# Altium PCB Ada - Base Block - Baseblock_issue 4.0.PcbDoc (part 2 of 2)
Units mil, origin at the board's own origin, x right, y up, seen from the top; angles counter-clockwise.
Board outline 2389.8 x 4110.27 mil, 2 copper layers (Top Layer, Bottom Layer), stack 61.855 mil thick; 112 components, 93 nets, 358 pads, 233 vias.
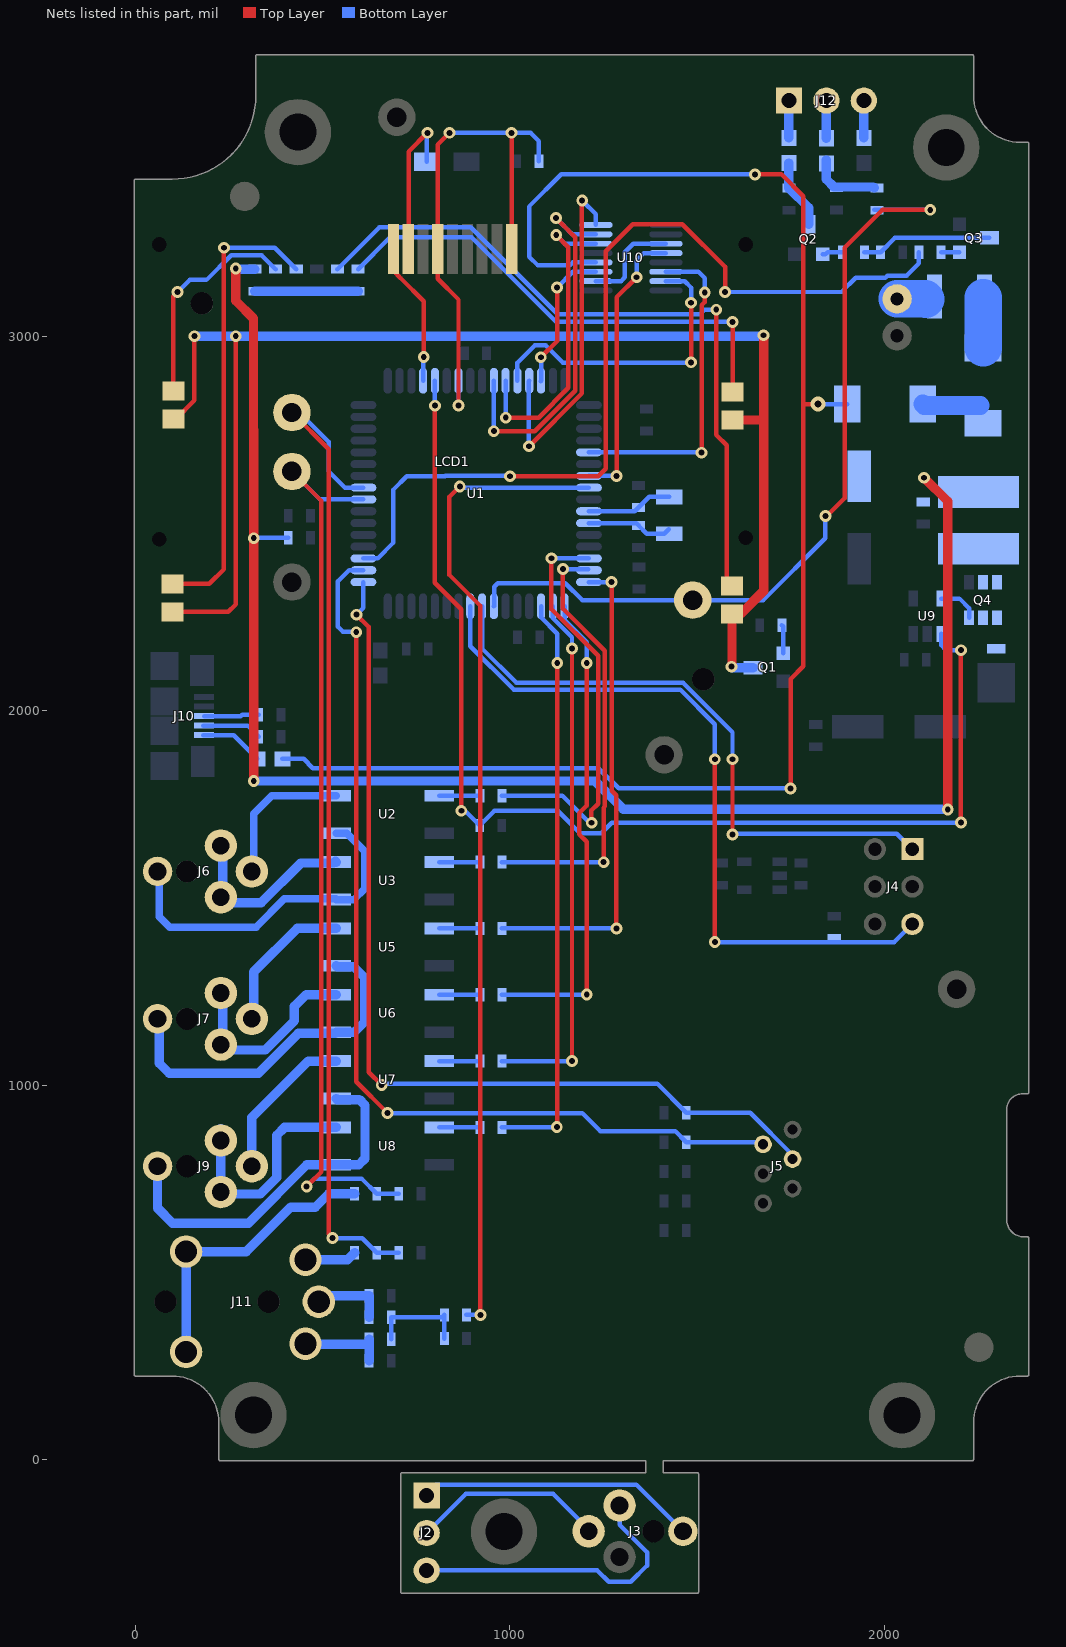
[diagram p2: the nets of this part, all layers, seen from the top]

## Via types
v1: diameter 31.5, hole 15.75, Top Layer to Bottom Layer, tented both sides, 231 vias
v2: diameter 39.37, hole 19.68, Top Layer to Bottom Layer, tented both sides, 2 vias

## Nets (pads, with @x,y where several pads share a name; then routed paths per layer and width w, separated by ;. In a path a pad name is that pad's centre, name@x,y a point inside that pad or via, vN(x,y) a via of type N, cw(c..) or ccw(c..) an arc to the next point about the centre after c; other vN are vias at no path point) (continued)
KEY4: J5.3 R4.1 U1.1 | length 2568.2
  Top Layer w12: v1(589.87,2256.22) 622.3,2223.8 622.3,1896.36 623.19,1895.47 623.19,1034.29 v1(657.48,1000)
  Bottom Layer w12: v1(589.87,2256.22) 608.71,2275.06 U1.1@608.71,2343.45 ; v1(657.48,1000) 661.42,1003.94 1393.12,1003.94 R4.1@1470.91,926.14 1641.9,926.14 1754.83,813.21 J5.3@1754.83,802.2
KEY5: J5.2 R5.1 U1.2 | length 2612.8
  Top Layer w12: v1(589.42,2209.49) 589.42,1009 v1(673.23,925.2)
  Bottom Layer w12: v1(589.42,2209.49) 587.81,2211.1 553.81,2211.1 540.71,2224.21 540.71,2345.45 570.21,2374.95 U1.2@608.71,2374.95 ; v1(673.23,925.2) 1192.91,925.2 1240.99,877.12 1441.2,877.12 R5.1@1470.91,847.4 1670.26,847.4 J5.2@1676.09,841.57
LCD_PWR: C8.2 LCD1.1 LCD1.6 U1.23 | length 1433.8
  Top Layer w12: v1(838.58,3543.31) 807.3,3512.03 807.3,3245.73 807.09,3245.51 807.09,3153.54 862.65,3097.98 v1(862.65,2814.96) ; v1(1003.94,3543.31) 1004.68,3542.57 LCD1.1@1004.68,3245.73
  Bottom Layer w12: v1(838.58,3543.31) v1(1003.94,3543.31) 1055.12,3543.31 1077.21,3521.21 C8.2@1077.21,3467.47 ; v1@862.2,2811.02 862.65,2811.47 v1(862.65,2814.96) U1.23@862.65,2880.85
LCD_RST: LCD1.9 U1.20 | length 319.6
  Top Layer w12: LCD1.9@695.53,3167.78 701.56,3161.74 701.56,3161.31 708.59,3154.28 709.03,3154.28 769.78,3093.52 v1(769.78,2944.6)
  Bottom Layer w12: U1.20@768.16,2880.85 768.16,2940.66 v1@772.1,2944.6
MIC: R25.1 U1.40 | length 2641.8
  Top Layer w12: v1(866.14,2598.43) 838.58,2570.87 838.58,2362.2 921.26,2279.53 v1(921.26,385.83)
  Bottom Layer w12: v1(866.14,2598.43) 869.15,2595.42 U1.40@1211.07,2595.42 ; R25.1@883.86,385.83 v1(921.26,385.83)
NetC9_1: C9.1 LCD1.8 | length 409.3
  Top Layer w12: LCD1.8@729.5,3233.21 729.5,3493.28 v1(779.53,3543.31)
  Bottom Layer w12: C9.1@778,3465.5 778,3541.78 v1(779.53,3543.31)
NetC14_1: C14.1 J11.1 R35.1 | length 198.3
  Bottom Layer w25: J11.1@489.42,421.12 505.31,437.01 R35.1@624.02,437.01 C14.1@624.02,379.92
NetC14_2: C14.2 C20.2 R25.2 R26.1 | length 266.2
  Bottom Layer w12: C20.2@683.07,320.87 C14.2@683.07,379.92 818.9,379.92 R25.2@824.8,385.83 R26.1@824.8,322.83
NetC18_2: C18.2 L5.2 R29.2 | length 188.7
  Bottom Layer w25: L5.2@1845.15,3470.79 1845.15,3419.15 1865.74,3398.57 1970.91,3398.57 R29.2@1972.88,3396.6
NetC19_2: C19.2 L4.2 Q2.3 | length 186
  Bottom Layer w25: L4.2@1745.15,3462.84 C19.2@1745.16,3395.54 1797.87,3342.84 Q2.3@1797.87,3298.67
NetC20_1: C20.1 J11.6 R34.1 | length 227.9
  Bottom Layer w25: J11.6@453.99,308.91 455.82,307.09 C20.1@624.02,307.09 ; R34.1@624.02,263.78 C20.1@624.02,307.09 ; C20.1@624.02,320.87 C20.1@624.02,307.09
NetD1_A: D1.A F1.2 | length 133.9
  Bottom Layer w100: D1.A@2263.78,2968.5 F1.2@2263.78,3102.36
NetD3_A: D3.A L2.2 Q4.1 Q4.2 Q4.5 Q4.6
NetF1_1: F1.1 J8.1 | length 76.7
  Bottom Layer w100: J8.1@2034.06,3099.67 2108.99,3099.67 2110.24,3098.43
NetJ2_1: J2.1 J3.1 | length 750.3
  Bottom Layer w12: J2.1@777.77,-96.57 777.77,-92.33 802.32,-67.78 1337.97,-67.78 J3.1@1462.18,-191.98
NetJ2_2: J2.2 J3.4 | length 521.7
  Bottom Layer w12: J2.2@777.77,-196.56 882,-92.33 1115.34,-92.33 1212.6,-189.59 J3.4@1210.21,-191.98
NetJ2_3: J2.3 J3.2 | length 809.6
  Bottom Layer w12: J2.3@777.77,-296.56 1233.57,-296.56 1263.78,-326.77 1322.83,-326.77 1366.14,-283.46 1366.14,-248.03 1292.89,-174.78 J3.2@1292.89,-123.08
NetJ6_1: J6.1 U2.3 U3.3 | length 907
  Bottom Layer w20: J6.1@63.43,1556.05 63.56,1555.92 63.56,1449.22 91.33,1421.45 321.84,1421.45 397.34,1496.95 534.35,1496.95 U3.3@535.88,1495.42 583.51,1495.42 612,1523.91 612,1624.19 563.61,1672.58 U2.3@535.88,1672.58
NetJ6_2: J6.2 J6.3 U3.4 | length 487.3
  Bottom Layer w25: J6.3@232.73,1624.95 232.73,1487.15 335.85,1487.15 441.62,1592.92 529.75,1592.92 534.06,1597.23 U3.4@535.88,1595.42
NetJ6_4: J6.4 U2.4 | length 409.1
  Bottom Layer w20: J6.4@315.4,1556.05 315.4,1724.43 363.98,1773 535.46,1773 U2.4@535.88,1772.58
NetJ7_1: J7.1 U5.3 U6.3 | length 927.5
  Bottom Layer w25: J7.1@63.43,1162.35 63.43,1058.1 89.89,1031.64 328.41,1031.64 434.63,1137.86 532.65,1137.86 U6.3@535.88,1141.09 583.96,1141.09 612,1169.13 612,1286.67 582.88,1315.78 538.34,1315.78 U5.3@535.88,1318.25
NetJ7_2: J7.2 J7.3 U6.4 | length 525
  Bottom Layer w25: J7.3@232.73,1231.24 232.73,1093.45 346.38,1093.45 424.37,1171.44 424.37,1210.11 455.64,1241.38 535.58,1241.38 U6.4@535.88,1241.09
NetJ7_4: J7.4 U5.4 | length 408.1
  Bottom Layer w25: J7.4@315.4,1162.35 315.4,1301.72 431.94,1418.25 U5.4@535.88,1418.25
NetJ9_1: J9.1 U7.3 U8.3 | length 981.4
  Bottom Layer w25: J9.1@58.71,783.01 58.71,671.18 98.86,631.04 301.82,631.04 457.54,786.76 U8.3@535.88,786.76 596.42,786.76 613.08,803.41 613.08,945.91 597.97,961.02 538.78,961.02 U7.3@535.88,963.92
NetJ9_2: J9.2 J9.3 U8.4 | length 622.6
  Bottom Layer w25: J9.3@228,883.73 J9.3@228,851.91 J9.2@228,714.11 228,708.88 333.2,708.88 377.21,752.89 377.21,865.89 398.08,886.76 U8.4@535.88,886.76
NetJ9_4: J9.4 U7.4 | length 385.9
  Bottom Layer w25: J9.4@310.68,814.83 310.68,913.1 461.5,1063.92 U7.4@535.88,1063.92
NetJ10_1: J10.1 L3.1 | length 170.7
  Bottom Layer w12: J10.1@180.67,1934.03 262.22,1934.03 L3.1@325.25,1871.01
NetJ10_2: J10.2 R21.2 | length 160.5
  Bottom Layer w12: J10.2@181.16,1960.11 299.14,1960.11 R21.2@329.18,1930.06
NetJ10_3: J10.3 R23.2 | length 147.3
  Bottom Layer w12: J10.3@183.39,1985.58 281.22,1985.58 284.76,1989.12 R23.2@329.18,1989.12
NetJ11_2: J11.2 R24.1 | length 138.9
  Bottom Layer w25: J11.2@453.99,533.32 566.31,533.34 R24.1@585.09,552.11
NetJ11_3: J11.3 R22.1 | length 781.8
  Bottom Layer w25: J11.3@135.09,287.26 J11.3@135.09,554.98 295.54,554.99 414.21,673.66 480.26,673.66 516.19,709.59 R22.1@585.09,709.59
NetJ12_1: J12.1 L4.1 | length 99.6
  Bottom Layer w25: L4.1@1745.15,3529.77 1745.15,3629.1 J12.1@1745.32,3629.28
NetJ12_2: J12.2 L5.1 | length 100.7
  Bottom Layer w25: L5.1@1845.33,3528.59 J12.2@1845.32,3629.28
NetJ12_3: J12.3 L6.1 | length 99.3
  Bottom Layer w25: L6.1@1945.53,3529.77 J12.3@1945.53,3629.07
NetLED1_A: LED1.A R9.1 | length 587.1
  Top Layer w12: LED1.A@101.07,2853.41 101.07,3106.53 v1(112.26,3117.73)
  Bottom Layer w12: v1(112.26,3117.73) 144.72,3150.18 189.42,3150.18 255.78,3216.54 336.61,3216.54 R9.1@374.02,3179.13
NetLED1_K: LED1.K LED2.K LED3.K LED4.K Q1.D | length 3735.3
  Top Layer w12: LED2.K@98.79,2263.66 247.91,2263.66 267.72,2283.46 v1(267.72,3000.1) ; LED1.K@107.54,2778.61 157.48,2828.54 v1(157.48,3000.1)
  Top Layer w25: LED1.K@101.07,2778.61 LED1.K@107.54,2778.61 ; v1@1593.27,2117.3 LED4.K@1593.27,2258.33 1616.6,2258.33 1677.61,2319.34 1677.61,2775.59 ; LED3.K@1594.6,2776.1 1677.1,2776.1 1677.61,2775.59 ; v1(1677.3,3002.52) 1677.61,3002.21 1677.61,2775.59
  Bottom Layer w25: v1(157.48,3000.1) v1(267.72,3000.1) v1@1677.61,3000.1 ; v1@1594.11,2115.15 1594.58,2114.68 Q1.D@1649.47,2114.68
  other v1: 1591.96,2117.3
NetLED2_A: LED2.A R11.1 | length 1228.6
  Top Layer w12: LED2.A@98.79,2338.46 196.73,2338.46 236.22,2377.95 v1(236.22,3236.22)
  Bottom Layer w12: v1(236.22,3236.22) 372.05,3236.22 R11.1@429.13,3179.13
NetLED3_A: LED3.A R30.1 | length 1316.1
  Top Layer w12: LED3.A@1594.6,2850.91 v1(1594.6,3038.29) v1@1594.69,3038.38
  Bottom Layer w12: R30.1@594.49,3179.13 679.13,3263.78 897.64,3263.78 1123.13,3038.29 v1(1594.6,3038.29)
NetLED4_A: LED4.A R31.1 | length 1910.6
  Top Layer w12: v1@1551.18,3066.93 1551.18,2736.22 1578.74,2708.66 1578.74,2347.66 LED4.A@1593.27,2333.14
  Bottom Layer w12: R31.1@539.37,3179.13 651.57,3291.34 895.53,3291.34 1127.82,3059.06 1507.87,3059.06 1519.68,3070.87 v1(1551.18,3070.87)
NetQ1_G: Q1.G R13.2 | length 76.6
  Bottom Layer w12: R13.2@1726.38,2228.35 1729.47,2225.26 Q1.G@1729.47,2153.06
NetQ2_1: Q2.1 R14.2 | length 54.3
  Bottom Layer w12: Q2.1@1835.87,3218.67 1842.88,3218.67 1848.62,3224.41 R14.2@1887.8,3224.41
NetQ3_B: Q3.B R10.2 | length 49.2
  Bottom Layer w12: R10.2@2151.57,3224.41 Q3.B@2200.79,3224.41
NetQ3_C: Q3.C R8.2 R14.1 | length 349.7
  Bottom Layer w12: R14.1@1946.85,3224.41 R8.2@1990.16,3224.41 2028.16,3262.41 Q3.C@2280.79,3262.41
NetQ4_3: Q4.3 U9.5 | length 111
  Bottom Layer w12: U9.5@2151.57,2299.21 2200.79,2299.21 2226.38,2273.62 Q4.3@2226.38,2248.03
NetR9_2: R9.2 R11.2 R30.2 R31.2 R32.1 R33.1 | length 275.6
  Bottom Layer w25: R32.1@318.9,3120.08 R9.2@374.02,3120.08 R11.2@429.13,3120.08 R33.1@484.25,3120.08 R31.2@539.37,3120.08 R30.2@594.49,3120.08
NetR15_1: R15.1 U2.1 | length 108.3
  Bottom Layer w12: U2.1@811.47,1772.58 R15.1@919.73,1772.58
NetR15_2: R15.2 U1.46 | length 1135.8
  Top Layer w12: v1(1110.88,2406.95) 1110.88,2271.01 1235.65,2146.24 1235.65,1751.35 1217.55,1733.25 1217.55,1701.17 v1(1218.3,1700.42)
  Bottom Layer w12: R15.2@978.79,1772.58 1140.34,1772.58 1212.5,1700.42 v1(1218.3,1700.42) ; v1(1110.88,2406.95) 1111.39,2406.44 U1.46@1211.07,2406.44
NetR16_1: R16.1 U3.1 | length 108.3
  Bottom Layer w12: U3.1@811.47,1595.42 R16.1@919.73,1595.42
NetR16_2: R16.2 U1.47 | length 1169.4
  Top Layer w12: v1(1141.73,2377.95) 1141.73,2271.65 1253.65,2159.73 1253.65,1743.89 1250.57,1740.81 v1@1250.57,1594.82
  Bottom Layer w12: R16.2@978.79,1595.42 1250.1,1595.42 v1(1250.38,1595.14) ; v1(1141.73,2377.95) U1.47@1208.66,2377.95
NetR17_1: R17.1 U5.1 | length 108.3
  Bottom Layer w12: U5.1@811.47,1418.25 R17.1@919.73,1418.25
NetR17_2: R17.2 U1.48 | length 1297.8
  Top Layer w12: v1(1271.65,2343.45) 1271.65,1785.86 1283.62,1773.89 v1@1283.62,1416.99
  Bottom Layer w12: R17.2@978.79,1418.25 1284.02,1418.25 v1(1284.41,1417.86) ; U1.48@1211.07,2343.45 v1(1271.65,2343.45)
NetR18_1: R18.1 U6.1 | length 108.3
  Bottom Layer w12: U6.1@811.47,1241.09 R18.1@919.73,1241.09
NetR18_2: R18.2 U1.49 | length 1305.6
  Top Layer w12: v1@1205.17,1241.09 1205.17,1649.53 1184.52,1670.18 1184.52,1725.67 1205.17,1746.32 v1(1205.17,2126.91)
  Bottom Layer w12: R18.2@978.79,1241.09 1204.98,1241.09 v1(1205.27,1241.37) ; U1.49@1146.11,2278.49 1146.11,2241.46 1205.17,2182.41 v1(1205.17,2126.91)
NetR19_1: R19.1 U7.1 | length 108.3
  Bottom Layer w12: U7.1@811.47,1063.92 R19.1@919.73,1063.92
NetR19_2: R19.2 U1.50 | length 1423.6
  Top Layer w12: v1(1165.8,1063.92) v1(1165.8,2166.28)
  Bottom Layer w12: R19.2@978.79,1063.92 1163.49,1063.92 v1@1165.69,1061.71 ; U1.50@1114.62,2278.49 1114.62,2247.5 1165.8,2196.32 v1(1165.8,2166.28)
NetR20_1: R20.1 U8.1 | length 108.3
  Bottom Layer w12: U8.1@811.47,886.76 R20.1@919.73,886.76
NetR20_2: R20.2 U1.51 | length 1556.6
  Top Layer w12: v1@1126.43,886.76 v1(1126.43,2126.91)
  Bottom Layer w12: R20.2@978.79,886.76 1124.49,886.76 v1(1125.33,887.6) ; U1.51@1083.12,2278.49 1083.12,2248.96 1126.43,2205.65 v1(1126.43,2126.91)
NetR22_2: R22.2 R28.1 TP2.1 U1.8 | length 2450.8
  Top Layer w12: TP2.1@417.76,2638.73 496.51,2559.98 496.51,768.65 v1(457.14,729.28)
  Bottom Layer w12: TP2.1@417.76,2638.73 492.57,2563.92 U1.8@608.71,2563.92 ; v1(457.14,729.28) 476.82,748.96 604.77,748.96 R22.2@644.14,709.59 R28.1@703.2,709.59
NetR24_2: R24.2 R27.1 TP1.1 U1.9 | length 2763.8
  Top Layer w12: TP1.1@417.76,2796.21 515.75,2698.22 515.75,600.96 v1(525.71,590.99)
  Bottom Layer w12: TP1.1@417.76,2796.21 437.45,2796.21 516.19,2717.47 516.19,2638.73 559.5,2595.42 U1.9@608.71,2595.42 ; v1(525.71,590.99) 605.26,590.99 R24.2@644.14,552.11 R27.1@703.2,552.11
NetR29_1: R29.1 TP4.1 U1.55 | length 2240.7
  Top Layer w12: v1@1846.46,2519.69 1893.7,2566.93 1893.7,3236.22 1995.02,3337.54 v1(2122.66,3337.54)
  Bottom Layer w12: U1.55@957.14,2278.49 958.05,2279.41 958.05,2330.93 967.47,2340.35 1147.9,2340.35 1192.97,2295.28 1677.17,2295.28 1842.52,2460.63 v1(1842.52,2519.69) ; R29.1@1972.88,3337.54 v1@2119.15,3337.54
NetR36_1: R36.1 U1.21 U9.1 | length 3130.3
  Top Layer w12: v1(799.57,2814.42) 799.57,2341.37 870.19,2270.74 v1(870.19,1732.4) ; v1(2204.72,1700.79) v1(2204.72,2161.42)
  Bottom Layer w12: v1(799.57,2814.42) 799.65,2814.51 U1.21@799.65,2880.85 ; v1(870.19,1732.4) 879.8,1732.4 R36.1@919.29,1692.91 958.66,1732.28 1127.36,1732.28 1186.96,1672.68 1243.54,1672.68 1271.65,1700.79 v1(2204.72,1700.79) ; U9.1@2151.57,2204.72 2151.57,2175.2 2165.35,2161.42 v1(2204.72,2161.42)
NetU1_26: U1.26 U10.15 | length 1005
  Top Layer w12: v1(957.03,2746.32) 1065.99,2746.32 1174.17,2854.5 1174.17,3264.46 1155.32,3283.31 1155.32,3283.59 1136.75,3302.15 1136.48,3302.15 v1(1122.76,3315.87)
  Bottom Layer w12: v1(957.03,2746.32) 957.04,2880.75 U1.26@957.14,2880.85 U1.26@957.42,2881.13 ; v1(1122.76,3315.87) 1136.48,3302.15 1136.75,3302.15 1155.32,3283.59 1155.32,3283.31 1166.54,3272.09 U10.15@1229.77,3272.09
NetU1_27: U1.27 U10.14 | length 836.7
  Top Layer w12: v1(988.72,2782.4) 1076.62,2782.4 1156.17,2861.95 1156.17,3237.92 v1(1123.63,3270.46)
  Bottom Layer w12: U1.27@988.63,2880.85 988.63,2782.49 v1(988.72,2782.4) ; v1(1123.63,3270.46) 1147,3247.09 U10.14@1229.77,3247.09
NetU1_28: U1.28 U10.7 | length 824.2
  Top Layer w12: v1(1483.77,2930.19) v1(1483.77,3089.36)
  Bottom Layer w12: U1.28@1020.13,2880.85 1020.13,2929.53 1066.03,2975.44 1095.65,2975.44 1141.69,2929.4 v1@1483.77,2929.4 ; U10.7@1416.78,3147.09 1466.61,3147.09 1483.77,3129.93 v1(1483.77,3089.36)
NetU1_29: U1.29 U10.16 | length 970.4
  Top Layer w12: v1(1051.29,2706.16) 1192.17,2847.04 1192.17,3361.72 1192.66,3362.2 v1(1192.91,3362.2)
  Bottom Layer w12: v1(1051.29,2706.16) 1050.84,2706.61 1050.84,2880.06 U1.29@1051.62,2880.85 ; v1(1192.91,3362.2) 1229.77,3325.35 U10.16@1229.77,3297.09
NetU1_30: U1.30 U10.11 | length 389.4
  Top Layer w12: v1(1082.52,2943.75) 1125.98,2987.22 v1(1125.98,3129.92)
  Bottom Layer w12: U1.30@1082.52,2880.25 U1.30@1083.12,2880.85 1083.12,2943.16 v1(1082.52,2943.75) ; v1(1125.98,3129.92) 1168.15,3172.09 U10.11@1229.77,3172.09
NetU1_37: U1.37 U10.6 | length 889.7
  Top Layer w12: v1@1518.93,2690.41 1511.81,2697.53 1511.81,3082.68 1520.34,3091.2 v1(1520.34,3116.95)
  Bottom Layer w12: U1.37@1211.07,2689.91 v1@1518.93,2689.91 ; U10.6@1416.78,3172.09 1503.56,3172.09 1520.34,3155.31 v1(1520.34,3116.95)
  other v1: 1511.81,2688.98
NetU1_39: U1.39 U10.4 | length 758.2
  Top Layer w12: v1@1285.63,2626.8 1285.63,2965.9 1285.63,3104.53 v1(1338.58,3157.48)
  Bottom Layer w12: U1.39@1211.07,2626.91 1284.83,2626.91 v1(1284.95,2626.8) ; v1(1338.58,3157.48) 1338.58,3203.13 1357.54,3222.09 U10.4@1416.78,3222.09
NetU10_3: U10.3 U10.10 | length 267.6
  Bottom Layer w12: U10.10@1229.77,3147.09 1296.7,3147.09 1307.09,3157.48 1307.09,3224.41 1329.77,3247.09 U10.3@1416.78,3247.09
PDI: J4.1 U1.56 | length 1645.3
  Top Layer w12: v1(1594.49,1669.29) v1(1594.49,1870.08)
  Bottom Layer w12: U1.56@925.64,2278.49 925.64,2165.94 1017.37,2074.21 1462.36,2074.21 1594.49,1942.09 v1(1594.49,1870.08) ; v1(1594.49,1669.29) 1596.65,1671.45 2033.28,1671.45 J4.1@2074.8,1629.92
RST: J4.5 R6.1 U1.57 | length 1975.3
  Top Layer w12: v1(1547.24,1381.89) v1(1547.24,1870.08)
  Bottom Layer w12: U1.57@894.14,2278.49 894.14,2171.98 1009.91,2056.21 1454.91,2056.21 1547.24,1963.88 v1(1547.24,1870.08) ; v1(1547.24,1381.89) 2026.77,1381.89 J4.5@2074.8,1429.92
STACK_SW: R10.1 U1.3 | length 2453.4
  Top Layer w12: v1(1000,2625.98) 1236.22,2625.98 1255.91,2645.67 1255.91,3226.87 1328.25,3299.21 1460.63,3299.21 1574.8,3185.04 v1(1574.8,3118.11)
  Bottom Layer w12: U1.3@608.71,2406.44 646.6,2406.44 688.98,2448.82 688.98,2590.55 724.41,2625.98 826.77,2625.98 827.7,2626.91 999.07,2626.91 v1(1000,2625.98) ; v1(1574.8,3118.11) 1885.83,3118.11 1923.76,3156.04 2002.75,3156.04 2008.38,3161.67 2059.31,3161.67 2092.52,3194.88 R10.1@2092.52,3224.41
VBAT: C12.1 C13.2 D1.K D2.K L2.1 R7.2 R32.2 | length 4485.9
  Top Layer w25: v1(267.72,3181.1) 267.72,3094.49 314.96,3047.24 v1(315.65,2460.6) v1(315.65,1811.95) ; v1(2106.3,2622.05) 2169.29,2559.06 v1(2169.29,1736.22)
  Bottom Layer w12: v1(315.65,2460.6) 316.61,2461.56 R7.2@407.92,2461.56
  Bottom Layer w25: v1(267.72,3181.1) 269.68,3179.13 R32.2@318.9,3179.13 ; v1(315.65,1811.95) 1227.42,1811.95 1303.15,1736.22 v1(2169.29,1736.22)
  Bottom Layer w50: D2.K@2102.36,2818.9 2106.3,2814.96 2256.35,2814.96
VBUS: D2.A L3.2 U10.12 | length 4228.3
  Top Layer w12: v1(1654.73,3432.3) 1725.18,3432.3 1783.65,3373.83 1783.65,2818.9 ; v1(1749.45,1792.27) 1749.45,2084.09 1783.65,2118.3 1783.65,2818.9 ; v2(1822.83,2818.9) 1783.65,2818.9
  Bottom Layer w12: L3.2@392.17,1871.01 449.1,1871.01 473.66,1846.46 1236.22,1846.46 1290.41,1792.27 v1(1749.45,1792.27) v1@1756.35,1792.27 ; U10.12@1229.77,3197.09 1167.7,3197.09 1159.58,3188.98 1074.8,3188.98 1051.18,3212.6 1051.18,3346.46 1137.02,3432.3 v1(1654.73,3432.3) ; v2(1822.83,2818.9) D2.A@1901.58,2818.9
X1: C1.2 U1.43 X1.1 | length 230.1
  Bottom Layer w12: U1.43@1211.07,2500.93 1337.17,2500.93 C1.2@1343.56,2494.54 1365.65,2472.44 1412.01,2472.44 X1.1@1424.27,2484.69
X2: C2.2 U1.42 X1.2 | length 230
  Bottom Layer w12: U1.42@1211.07,2532.43 1333.39,2532.43 C2.2@1343.12,2542.16 1371.83,2570.87 X1.2@1425.2,2570.87
pads on no net: "Fiducial 1.0" "Fiducial 2.0" Hole1.1 Hole2.1 Hole3.1 Hole4.1 Hole5.1 J3.0 J3.3 J4.3 J4.4 J6.0 J7.0 J9.0 J10.0 J10.4 J11.0 LCD1.0 U1.4 U1.5 U1.6 U1.10 U1.11 U1.12 U1.13 U1.22 U1.31 U1.41 U1.58 U1.59 U4.4 U9.3

## Polygon pours and split planes (outlines as drawn)
GND on Top Layer "Top Layer-No Net2" (solid, remove dead copper, pour order 5): 222.63,0.29 cw(c226.59,0.29) 222.63,0.35 222.63,98.71 ccw(c98.63,98.71) 98.63,222.71 cw(c98.63,226.66) 98.6,222.71 0.21,222.71 cw(c0.21,226.66) -3.74,226.66 -3.74,3415.64 cw(c0.21,3415.64) 0.21,3419.59 98.63,3419.59 cw(c98.63,3415.64) 98.66,3419.59 ccw(c98.63,3642.02) 321.06,3641.99 cw(c325.01,3642.02) 321.06,3642.02 321.06,3748.32 cw(c325.01,3748.32) 325.01,3752.27 2234.46,3752.27 cw(c2234.46,3748.32) 2238.41,3748.32 2238.41,3642.02 ccw(c2362.41,3642.02) 2362.41,3518.02 cw(c2362.41,3514.07) 2362.44,3518.02 2382.1,3518.02 cw(c2382.1,3514.07) 2386.05,3514.07 2386.05,980.31 cw(c2382.1,980.31) 2382.1,976.36 2368.9,976.36 ccw(c2368.9,980.31) 2368.93,976.36 2368.9,976.36 ccw(c2368.9,934.25) 2326.79,934.25 2326.79,640.55 ccw(c2372.83,640.55) 2372.83,594.5 2382.1,594.5 cw(c2382.1,590.55) 2386.05,590.55 2386.05,226.66 cw(c2382.1,226.66) 2382.1,222.71 2362.41,222.71 ccw(c2362.41,226.66) 2362.44,222.71 2362.41,222.71 ccw(c2362.41,98.71) 2238.41,98.71 2238.41,0.29 cw(c2234.46,0.29) 2234.46,-3.67 1409.46,-3.67 1409.46,-35.13 1525.8,-35.13 cw(c1525.8,-39.08) 1529.75,-39.08 1529.75,-354.05 cw(c1525.8,-354.05) 1525.8,-358 699.03,-358 cw(c699.03,-354.05) 695.08,-354.05 695.08,-39.08 cw(c699.03,-39.08) 699.03,-35.13 1362.19,-35.13 1362.19,-3.67 226.65,-3.67 cw(c226.59,0.29)
GND on Bottom Layer "Top Layer-No Net" (solid, remove dead copper, pour order 8): 222.63,0.29 cw(c226.59,0.29) 222.63,0.35 222.63,98.71 ccw(c98.63,98.71) 98.63,222.71 cw(c98.63,226.66) 98.6,222.71 0.21,222.71 cw(c0.21,226.66) -3.74,226.66 -3.74,3415.64 cw(c0.21,3415.64) 0.21,3419.59 98.63,3419.59 cw(c98.63,3415.64) 98.66,3419.59 ccw(c98.63,3642.02) 321.06,3641.99 cw(c325.01,3642.02) 321.06,3642.02 321.06,3748.32 cw(c325.01,3748.32) 325.01,3752.27 2234.46,3752.27 cw(c2234.46,3748.32) 2238.41,3748.32 2238.41,3642.02 ccw(c2362.41,3642.02) 2362.41,3518.02 cw(c2362.41,3514.07) 2362.44,3518.02 2382.1,3518.02 cw(c2382.1,3514.07) 2386.05,3514.07 2386.05,980.31 cw(c2382.1,980.31) 2382.1,976.36 2368.9,976.36 ccw(c2368.9,980.31) 2368.93,976.36 2368.9,976.36 ccw(c2368.9,934.25) 2326.79,934.25 2326.79,640.55 ccw(c2372.83,640.55) 2372.83,594.5 2382.1,594.5 cw(c2382.1,590.55) 2386.05,590.55 2386.05,226.66 cw(c2382.1,226.66) 2382.1,222.71 2362.41,222.71 ccw(c2362.41,226.66) 2362.44,222.71 2362.41,222.71 ccw(c2362.41,98.71) 2238.41,98.71 2238.41,0.29 cw(c2234.46,0.29) 2234.46,-3.67 1409.46,-3.67 1409.46,-35.13 1525.8,-35.13 cw(c1525.8,-39.08) 1529.75,-39.08 1529.75,-354.05 cw(c1525.8,-354.05) 1525.8,-358 699.03,-358 cw(c699.03,-354.05) 695.08,-354.05 695.08,-39.08 cw(c699.03,-39.08) 699.03,-35.13 1362.19,-35.13 1362.19,-3.67 226.65,-3.67 cw(c226.59,0.29)

## Keep-outs
Keep-Out Layer:
  lines w7.87: 226.59,0.29 226.59,98.71 ccw(c98.63,98.71) 98.63,226.66 ; 2234.46,0.29 2234.46,98.71 cw(c2362.41,98.71) 2362.41,226.66 ; 98.63,226.66 0.21,226.66 0.21,3415.64 98.63,3415.64 ; 98.63,226.66 98.63,226.66 ; 98.63,3415.64 ccw(c98.63,3642.02) 325.01,3642.02 ; 98.63,3415.64 98.63,3415.64 ; 325.01,3642.02 325.01,3748.32 2234.46,3748.32 2234.46,3642.02 ccw(c2362.41,3642.02) 2362.41,3514.07 ; 325.01,3642.02 325.01,3642.02 ; 2362.41,226.66 2382.1,226.66 2382.1,590.55 2372.83,590.55 cw(c2372.83,640.55) 2322.83,640.55 2322.83,669.29 2322.83,934.25 cw(c2368.9,934.25) 2368.9,980.31 2382.1,980.31 2382.1,3514.07 2362.41,3514.07 ; 2362.41,226.66 2362.41,226.66 ; 2362.41,3514.07 2362.41,3514.07 ; 702.98,-350.09 702.98,-43.04 1521.85,-43.04 1521.85,-350.09 702.98,-350.09
  text ".Layer_Name" at 5967.75,656.68 h120

## Other copper
Top Layer:
  pour cut-out: -146.29,1712.6 393.7,1712.6 393.7,633.86 -153.54,633.86 -153.54,614.17
  text ".Layer_Name" at 4077.99,302.35 h120
Bottom Layer:
  rectangle net GND: 1866.14,2314.96 1905.51,2346.46
  rectangle net GND: 1783.46,1503.94 1822.83,1555.12
  rectangle net GND: 1748.03,1476.38 1799.21,1547.24
  rectangle net GND: 1704.72,1547.24 1799.21,1570.87
  rectangle net 3V3: 1555.12,1586.61 1641.73,1629.92
  rectangle net GND: 1779.53,1925.2 2051.18,2279.53
  rectangle net 5V: 2082.68,1925.2 2358.27,2129.92
  rectangle net NetD3_A: 2255.91,2153.54 2358.27,2417.32
  rectangle net GND: 1893.7,2275.59 2094.49,2330.71
  rectangle net GND: 1874.02,2330.71 2129.92,2511.81
  rectangle net GND: 1893.7,2330.71 2240.16,2377.95
  rectangle net VBAT: 2110.24,2685.04 2354.33,2870.08
  rectangle net VBAT: 1885.83,2555.12 2354.33,2688.98
  pour cut-out: 2366.14,2535.43 2051.18,2535.43 2051.18,2173.23 2366.14,2173.23
  pour cut-out: -149.61,1807.09 732.28,1807.09 732.28,633.86 -157.48,633.86 -157.48,614.17
  text ".Layer_Name" at 4727.59,184.24 h120
Multi-Layer:
  text ".Layer_Name" at 5022.87,656.68 h120

## Silkscreen, mask and mechanical layers (free items; w line width, h text height)
Top Overlay:
  text ".Layer_Name" at 4077.99,420.46 h120
Bottom Overlay:
  drawing of 984 lines, arcs and shapes, not listed
  text "c Triggertrap Ltd" at 1953.12,1216.45 h39.37
  text ".PCBVersionNumber" at 1291.34,1129.92 h39.37
  text ".PCBName" at 1929.13,1129.92 h39.37
  text ".PCBIssueDate" at 1921.26,1066.93 h39.37
  text "Copyright 2014" at 1669.29,227.53 h39.37
  text ".Layer_Name" at 4727.59,66.13 h120
Top Paste:
  text ".Layer_Name" at 5022.87,420.46 h120
Bottom Paste:
  text ".Layer_Name" at 5022.87,302.35 h120
Top Solder:
  text ".Layer_Name" at 5022.87,184.24 h120
Bottom Solder:
  text ".Layer_Name" at 5022.87,66.13 h120
Drill Guide:
  text ".Layer_Name" at 5967.75,538.57 h120
Mechanical 1:
  lines w7.87: 226.59,0.29 226.59,98.71 ccw(c98.63,98.71) 98.63,226.66 0.21,226.66 0.21,3415.64 98.63,3415.64 ccw(c98.63,3642.02) 325.01,3642.02 325.01,3748.32 2234.46,3748.32 2234.46,3642.02 ccw(c2362.41,3642.02) 2362.41,3514.07 2382.1,3514.07 2382.1,980.31 2368.9,980.31 ccw(c2368.9,934.25) 2322.83,934.25 2322.83,669.29 2322.83,640.55 ccw(c2372.83,640.55) 2372.83,590.55 2382.1,590.55 2382.1,226.66 2362.41,226.66 ccw(c2362.41,98.71) 2234.46,98.71 2234.46,0.29 1405.51,0.29 1405.51,-39.08 1500,-39.08 1500,-354.05 712.6,-354.05 712.6,-39.08 738.4,-39.08 1366.14,-39.08 1366.14,0.29 226.58,0.29 ; 226.58,0.28 226.58,0.29
  text ".Layer_Name" at 4077.99,656.68 h120
Mechanical 2:
  lines w7.87: -181.1,1622.05 -62.99,1622.05 ; -181.1,1740.16 -62.99,1740.16 ; -181.1,1858.27 -62.99,1858.27 ; -181.1,1968.5 -62.99,1968.5 ; -181.1,2086.61 -62.99,2086.61 ; -181.1,2204.72 -62.99,2204.72 ; -173.23,90.55 -55.12,90.55 ; -173.23,208.66 -55.12,208.66 ; -173.23,326.77 -55.12,326.77 ; -173.23,480.31 -55.12,480.31 ; -173.23,598.43 -55.12,598.43 ; -173.23,716.54 -55.12,716.54 ; -173.23,862.2 -55.12,862.2 ; -173.23,980.31 -55.12,980.31 ; -173.23,1098.43 -55.12,1098.43 ; -173.23,1244.09 -55.12,1244.09 ; -173.23,1362.2 -55.12,1362.2 ; -173.23,1480.31 -55.12,1480.31 ; -102.36,1582.68 -62.99,1622.05 ; -102.36,1661.42 -62.99,1622.05 ; -102.36,1700.79 -62.99,1740.16 ; -102.36,1779.53 -62.99,1740.16 ; -102.36,1818.9 -62.99,1858.27 ; -102.36,1897.64 -62.99,1858.27 ; -102.36,1929.13 -62.99,1968.5 ; -102.36,2007.87 -62.99,1968.5 ; -102.36,2047.24 -62.99,2086.61 ; -102.36,2125.98 -62.99,2086.61 ; -102.36,2165.35 -62.99,2204.72 ; -102.36,2244.09 -62.99,2204.72 ; -94.49,51.18 -55.12,90.55 ; -94.49,129.92 -55.12,90.55 ; -94.49,169.29 -55.12,208.66 ; -94.49,248.03 -55.12,208.66 ; -94.49,287.4 -55.12,326.77 ; -94.49,366.14 -55.12,326.77 ; -94.49,440.94 -55.12,480.31 ; -94.49,519.68 -55.12,480.31 ; -94.49,559.06 -55.12,598.43 ; -94.49,637.8 -55.12,598.43 ; -94.49,677.17 -55.12,716.54 ; -94.49,755.91 -55.12,716.54 ; -94.49,822.83 -55.12,862.2 ; -94.49,901.57 -55.12,862.2 ; -94.49,940.94 -55.12,980.31 ; -94.49,1019.68 -55.12,980.31 ; -94.49,1059.06 -55.12,1098.43 ; -94.49,1137.8 -55.12,1098.43 ; -94.49,1204.72 -55.12,1244.09 ; -94.49,1283.46 -55.12,1244.09 ; -94.49,1322.83 -55.12,1362.2 ; -94.49,1401.57 -55.12,1362.2 ; -94.49,1440.94 -55.12,1480.31 ; -94.49,1519.68 -55.12,1480.31 ; 984.25,-433.07 1023.62,-393.7 ; 1023.62,-511.81 1023.62,-393.7 ; 1062.99,-433.07 1023.62,-393.7 ; 1102.36,-433.07 1141.73,-393.7 ; 1141.73,-511.81 1141.73,-393.7 ; 1181.1,-433.07 1141.73,-393.7 ; 1220.47,-433.07 1259.84,-393.7 ; 1259.84,-511.81 1259.84,-393.7 ; 1299.21,-433.07 1259.84,-393.7 ; 1574.8,-354.33 1535.43,-314.96 ; 1574.8,-275.59 1535.43,-314.96 ; 1574.8,-236.22 1535.43,-196.85 ; 1574.8,-157.48 1535.43,-196.85 ; 1574.8,-118.11 1535.43,-78.74 ; 1574.8,-39.37 1535.43,-78.74 ; 1653.54,-314.96 1535.43,-314.96 ; 1653.54,-196.85 1535.43,-196.85 ; 1653.54,-78.74 1535.43,-78.74 ; 2452.76,744.09 2413.39,783.46 ; 2452.76,822.83 2413.39,783.46 ; 2452.76,862.2 2413.39,901.57 ; 2452.76,940.94 2413.39,901.57 ; 2456.69,515.75 2417.32,555.12 ; 2456.69,594.49 2417.32,555.12 ; 2456.69,968.5 2417.32,1007.87 ; 2456.69,1047.24 2417.32,1007.87 ; 2531.5,783.46 2413.39,783.46 ; 2531.5,901.57 2413.39,901.57 ; 2535.43,555.12 2417.32,555.12 ; 2535.43,1007.87 2417.32,1007.87 ; 2413.39,665.35 2531.5,665.35 2413.39,665.35 ; 2413.39,665.35 2452.76,625.98 2413.39,665.35 ; 2413.39,665.35 2452.76,704.72 2413.39,665.35
  lines w15.75: 4225.06,917.32 4225.06,2283.21 4227.12,2281.14 6439.53,2281.14 6441.59,2279.08 6469.15,2279.08 6469.15,917.32
  lines w19.68: 3861.45,-248.83 6774.84,-248.83 ; 3861.45,-12.61 6774.84,-12.61 ; 3861.45,912.58 6774.84,912.58 ; 3861.45,2369.28 6794.52,2369.28 ; 3861.45,3255.1 6774.84,3255.1 ; 3861.45,4613.37 3861.45,-957.5 6794.52,-957.5 ; 3881.14,-721.27 6794.52,-721.27 ; 3881.14,-485.05 6794.52,-485.05 ; 4885.07,-946.31 4885.07,-12.61 ; 6735.47,4613.37 6794.52,4613.37 6794.52,-946.31
  lines w40: 3851.32,-950.64 -1598.43,-950.64 -1598.43,4619.35 6734.88,4619.35
  text "Manufacturing Notes" at 4255.15,4495.26 h120
  text "Finished Board Thickness 1mm" at 4255.15,4318.09 h120
  text "Board to be FR4 Material" at 4255.15,4199.98 h120
  text "Board is 2 layer" at 4255.15,4081.87 h120
  text "Double sided resist in GREEN" at 4255.15,3963.76 h120
  text "2 Idents" at 4255.15,3845.65 h120
  text "Copper weight to be 1 oz finished" at 4255.15,3727.54 h120
  text "All Holes PTH" at 4255.15,3609.43 h120
  text "Please ignore all items outside MECH 1" at 4255.15,3491.32 h120
  text "Finish HASL Lead Free" at 4255.15,3373.21 h120
  text "Build notes" at 4255.15,3077.94 h120
  text "LED Cathodes are identified, assembler to refer" at 4255.15,2959.83 h120
  text "to part datasheet for correct orientation." at 4255.15,2841.72 h120
  text "Layout by:" at 4314.21,2133.06 h120
  text "Copyright 2014" at 5613.42,2074 h120
  text "Cubik Innovation" at 4373.26,1896.84 h120
  text "Bristol and Bath Science Park" at 4373.26,1778.73 h120
  text "NO PIPS" at -263.78,1708.66 h60 r90
  text "Dirac Crescent" at 4373.26,1660.61 h120
  text "Bristol BS16 7FR" at 4373.26,1542.5 h120
  text "Tel: 0117 244 3000" at 4373.26,1188.17 h120
  text "Email: paul.mullen@cubik-innovation.co.uk" at 4373.26,1070.06 h120
  text "NO PIPS" at -255.91,834.65 h60 r90
  text "Layer" at 3900.82,774.79 h120
  text "NO PIPS" at 2641.73,578.74 h60 r90
  text ".Layer_Name" at 4077.99,538.57 h120
  text "NO PIPS" at -251.97,74.8 h60 r90
  text "Drawn by" at 3959.88,-170.09 h120
  text ".PCBDrawnBy" at 4983.5,-170.09 h120
  text "NO PIPS" at 1724.41,-224.41 h60
  text "Date" at 3959.88,-406.31 h120
  text ".PCBIssueDate" at 4983.5,-406.31 h120
  text "NO PIPS" at 937.01,-622.05 h60
  text "Issue" at 3959.88,-642.53 h120
  text ".PCBVersionNumber" at 4983.5,-642.53 h120
  text "Document Name" at 3959.88,-878.76 h120
  text ".Pcb_File_Name_No_Path" at 4983.5,-878.76 h120
Mechanical 3:
  drawing of 209 lines, arcs and shapes, not listed
Mechanical 15:
  drawing of 1009 lines, arcs and shapes, not listed
Drill Drawing:
  text ".Layer_Name" at 5022.87,538.57 h120

## Dimensions
226.58,0.29 to 58.71,1570.41 on Mechanical 2
0.21,3415.64 to 2382.1,3514.07 on Mechanical 2
2234.46,3748.32 to 2234.46,0.29 on Mechanical 2
226.58,0.29 to 79.97,421.12 on Mechanical 2
79.97,421.12 to 58.71,783.01 on Mechanical 2
58.71,783.01 to 58.71,1176.71 on Mechanical 2
58.71,1176.71 to 58.71,1570.41 on Mechanical 2
712.6,-39.08 to 712.6,-354.05 on Mechanical 2
1500,-354.05 to 712.6,-354.05 on Mechanical 2

## Text inside footprints (layer, text, board x,y; h text height)
F1: Bottom Overlay "FUSE" at 2216.54,3157.48 h30 r90
J4: Bottom Overlay "1" at 2094.8,1729.92 h50 r90; Bottom Overlay "2" at 1994.8,1729.92 h50 r90